# EAGLE board tip120_controller (EAGLE 9.0.0)
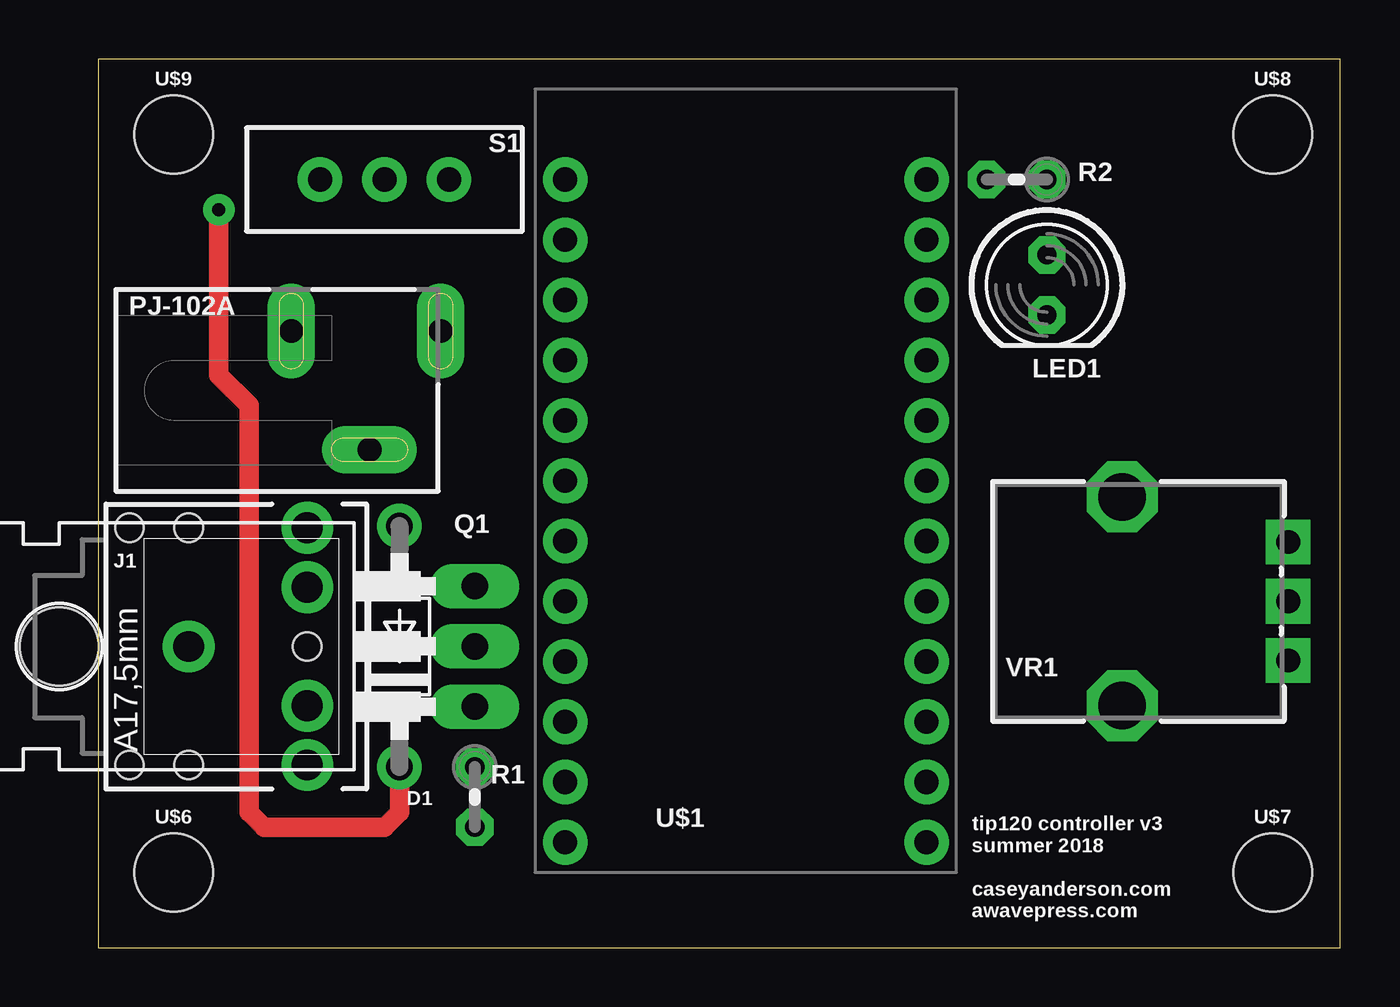
[diagram p0: board, top side]
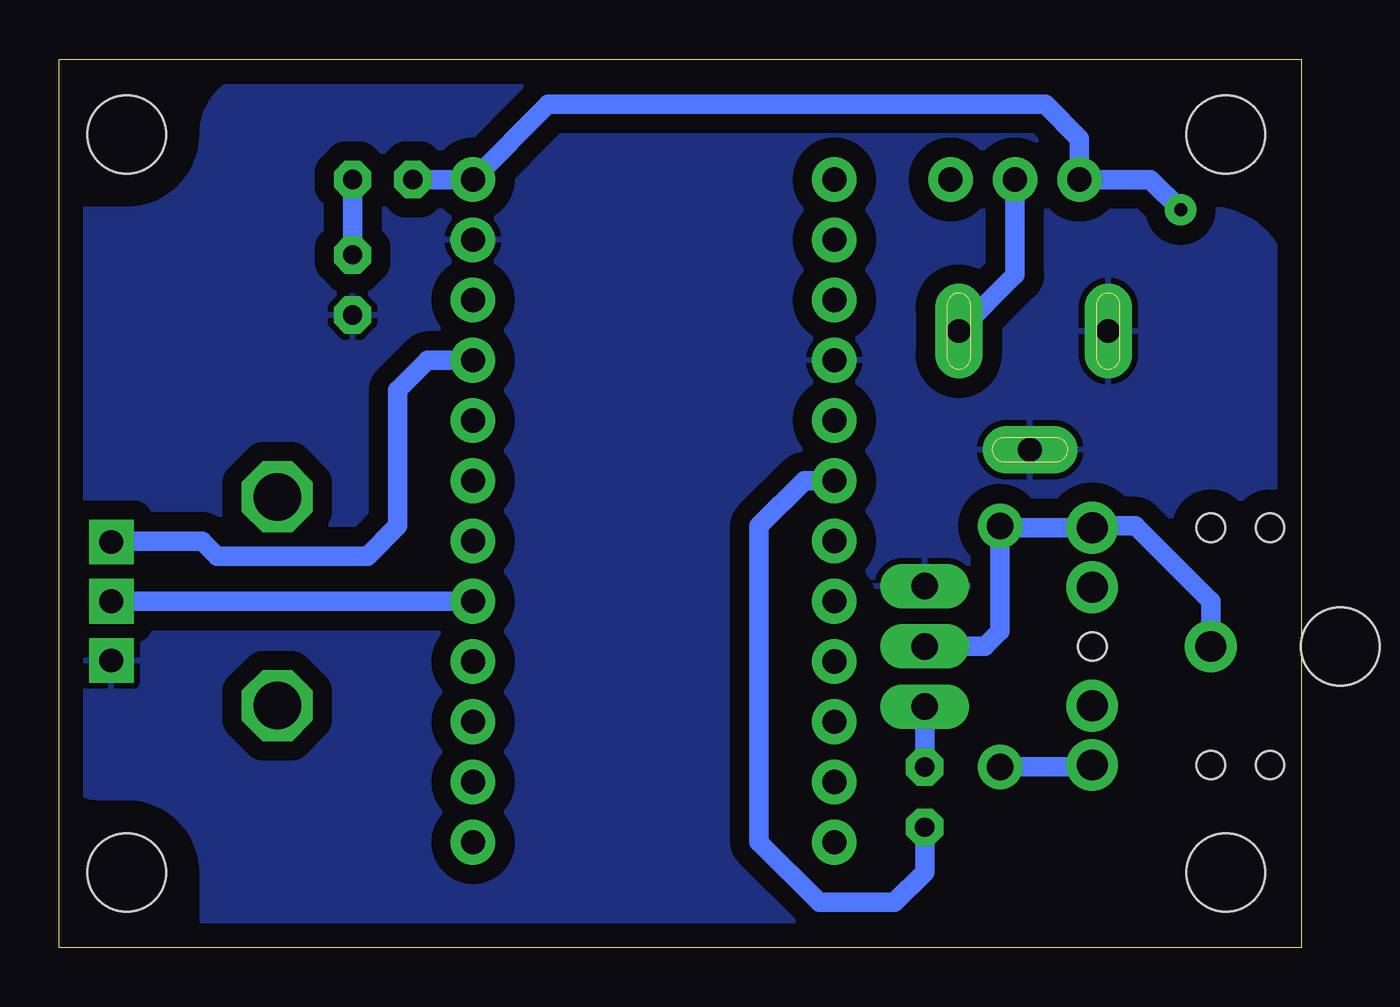
[diagram p1: board, bottom side, seen from below]

Size 52.38 x 37.46 mm. Coordinates in mm from the lower left corner, seen from the top.
Outline: 0,0 52.38,0 52.38,37.46 0,37.46 0,0
Copper layers (1*16): Top 0.035mm / dielectric 1.5mm / Bottom 0.035mm
Design rules "default *": minimum track width 10mil, minimum drill 24mil, track to track 8mil, track to pad 8mil, pad to pad 8mil, via to via 8mil, smd to smd 8mil, copper to edge 40mil, drill to drill 8mil, minimum pad ring 15mil, minimum via ring 15mil, stop-mask expansion 4mil, vias tented up to drill 0mil, thermal gap 10mil

## Footprints (pad centres in the part's own frame; a part is rotated, then mirrored left to right if it is on the bottom)
DO41-10 = drill 1.118: A 5.08,0; C -5.08,0
AUDIO-JACK = drill 1.3 pad 2.184: RING 5,5; RSH 5,2.5; SLEEVE 0,0; TIP 5,-5; TSH 5,-2.5 | hole 1.2: 0,5; -2.5,5; -2.5,-5; 0,-5; 5,0
LED5MM = drill 0.813 octagon: A -1.27,0; K 1.27,0
SCD-014-A = drill 1 pad 2 long: 1 -2.5,13.8; 2 -2.5,7.5; 3 2.5,10.8
TO220AH = drill 1.118 long: B -2.54,-6.35; C 0,-6.35; E 2.54,-6.35 | hole 3.302: 0,11.176
0204V = drill 0.813 octagon: 1 -1.27,0; 2 1.27,0
SWITCH_SPDT_PTH_11.6X4.0MM_KIT = drill 1.016 pad 1.88: 1 0,2.718; 2 0,0; 3 0,-2.718
ARDUINO_MINI = drill 1.016 pad 1.88: 1 -7.62,12.7; 2 -7.62,10.16; 3 -7.62,7.62; 4 -7.62,5.08; 5 -7.62,2.54; 6 -7.62,0; 7 -7.62,-2.54; 8 -7.62,-5.08; 9 -7.62,-7.62; 10 -7.62,-10.16; 11 -7.62,-12.7; 12 -7.62,-15.24; 13 7.62,-15.24; 14 7.62,-12.7; 15 7.62,-10.16; 16 7.62,-7.62; 17 7.62,-5.08; 18 7.62,-2.54; 19 7.62,0; 20 7.62,2.54; 21 7.62,5.08; 22 7.62,7.62; 23 7.62,10.16; 24 7.62,12.7
STAND-OFF = hole 3.302: 0,0
POT-PTH-ALPS = drill 1 pad 1.88 square: P$1 7,-2.5; P$2 7,0; P$3 7,2.5 | drill 2 octagon: P$4 0,-4.4; P$5 0,4.4

## Placement (x,y rotation side)
D1  1N4004  [DO41-10]  12.7,12.7 90 top
J1  AUDIO_JACK_3.5MM_PTH  [AUDIO-JACK]  3.81,12.7 0 top
LED1  [LED5MM]  40,27.94 270 top
PJ-102A  6-12V  [SCD-014-A]  0.64,23.49 270 top
Q1  TIP120  [TO220AH]  9.53,12.7 90 top
R1  2.2k  [0204V]  15.88,6.35 270 top
R2  220  [0204V]  38.73,32.38 180 top
S1  6-12V  [SWITCH_SPDT_PTH_11.6X4.0MM_KIT]  12.06,32.38 270 top
U$1  ARDUINO_MINI  [ARDUINO_MINI]  27.31,19.69 0 top
U$6  [STAND-OFF]  3.17,3.18 0 top
U$7  [STAND-OFF]  49.53,3.18 0 top
U$8  [STAND-OFF]  49.53,34.29 0 top
U$9  [STAND-OFF]  3.17,34.29 0 top
VR1  10k  [POT-PTH-ALPS]  43.18,14.61 0 top

## Library data of the parts
D1 = diode
J1 = SparkFun-Connectors; PROD_ID: CONN-08774; SF_ID: PRT-08032
LED1 = led
PJ-102A = con-shiua-chyuan; OC_FARNELL: unknown; OC_NEWARK: unknown
Q1 = transistor-power
R1 R2 = resistor
S1 = SparkFun-Switches; PROD_ID: SWCH-08261; SF_SKU: COM-00102
U$1 = SparkFun-Boards
U$6-U$9 = SparkFun-Hardware
VR1 = SparkFun-Resistors; PROD_ID: RES-09177; SF_SKU: COM-09288

## Nets
AGND: LED1.K PJ-102A.2 PJ-102A.3 Q1.E U$1.4 U$1.23 VR1.P$1
N$1: R1.2 U$1.6
N$2: Q1.B R1.1
N$3: LED1.A R2.1
N$4: D1.A J1.RING J1.SLEEVE Q1.C
N$5: U$1.21 VR1.P$3
N$6: U$1.17 VR1.P$2
N$7: PJ-102A.1 S1.2
N$8: D1.C J1.TIP R2.2 S1.3 U$1.24

## Tracks (layer width: path | path; a pad name or v marks a point on that pad's centre or on a via)
AGND
  pour Bottom (isolate 0.813): 6.35,36.83 43.81,36.83 arc-90 46.35,34.29 arc90 49.53,31.12 51.43,31.12 arc-90 52.07,30.48 52.07,7.62 arc-90 50.8,6.35 49.53,6.35 arc90 46.35,3.18 46.35,1.27 arc-90 45.72,0.64 7.62,0.64 arc-90 6.35,1.91 6.35,3.18 arc90 3.17,6.35 1.27,6.35 arc-90 0.64,6.99 0.64,27.94 arc-90 3.81,31.12 arc90 6.35,33.66 6.35,36.2
N$1
  Bottom 0.813: U$1.6 20.96,19.69 22.86,17.78 22.86,4.45 20.32,1.91 17.15,1.91 15.88,3.18 R1.2
N$2
  Bottom 0.813: R1.1 Q1.B
N$3
  Bottom 0.813: R2.1 LED1.A
N$4
  Bottom 0.813: J1.SLEEVE 3.81,14.61 6.98,17.78 8.73,17.78 J1.RING 12.62,17.7 D1.A 12.7,13.34 13.33,12.7 Q1.C
N$5
  Bottom 0.813: U$1.21 36.83,24.77 38.1,23.49 38.1,17.78 39.37,16.51 45.72,16.51 46.35,17.15 50.14,17.15 VR1.P$3
N$6
  Bottom 0.813: VR1.P$2 U$1.17
N$7
  Bottom 0.813: PJ-102A.1 12.06,28.37 S1.2
N$8  (via drill 0.55 pad 0.35)
  Top 0.813: D1.C 12.7,5.72 12.06,5.08 6.98,5.08 6.35,5.72 6.35,22.86 5.08,24.13 v5.08,31.12
  Bottom 0.813: R2.2 U$1.24 31.75,35.56 10.79,35.56 9.35,34.11 S1.3 6.35,32.38 v5.08,31.12 | J1.TIP 8.89,7.62 D1.C

## Text on the board
tPlace: tip120 controller v3 / summer 2018 / / caseyanderson.com / awavepress.com